# Altium PCB PowerLightBoard.PcbDoc
Units mil, origin at the board's own origin, x right, y up, seen from the top; angles counter-clockwise.
Board outline 2245 x 649.61 mil, 2 copper layers (Top Layer, Bottom Layer); 26 components, 24 nets, 98 pads, 25 vias.
Unrouted connection lines stored in the file: 1.
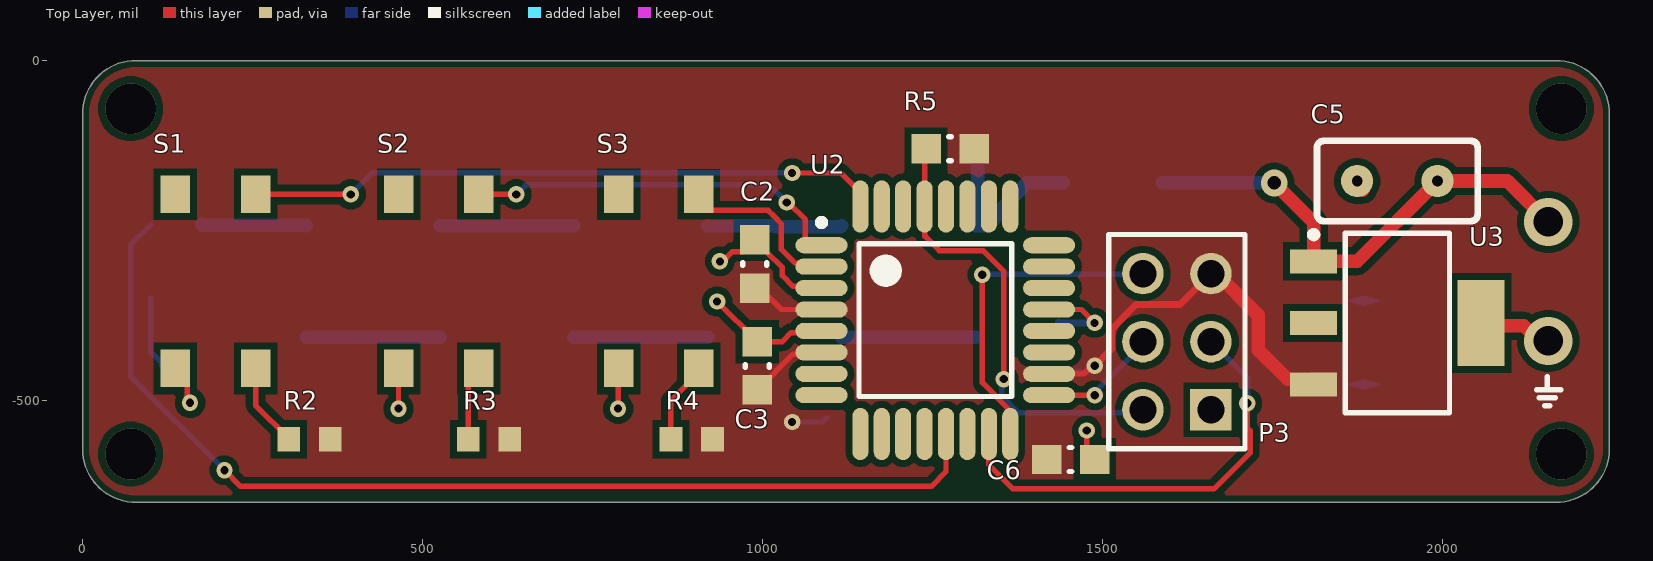
[diagram p0: Top Layer view]
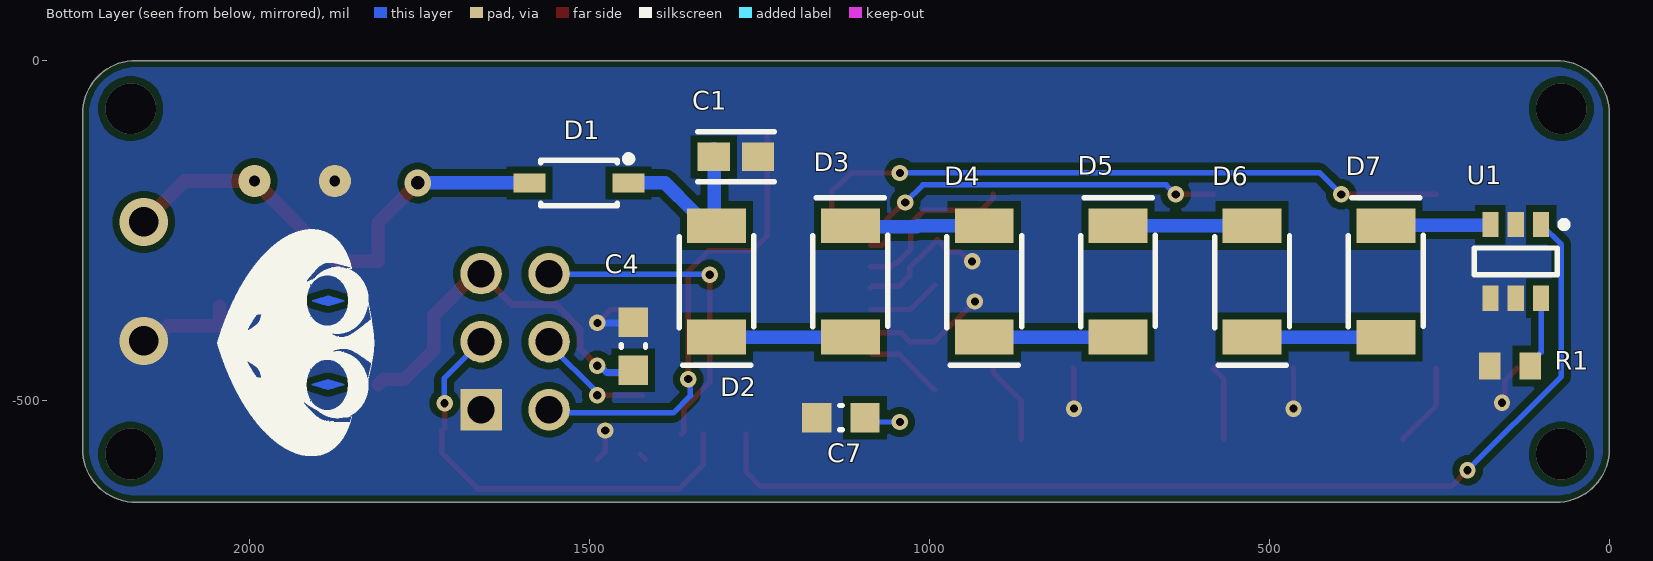
[diagram p1: Bottom Layer view, seen from below]
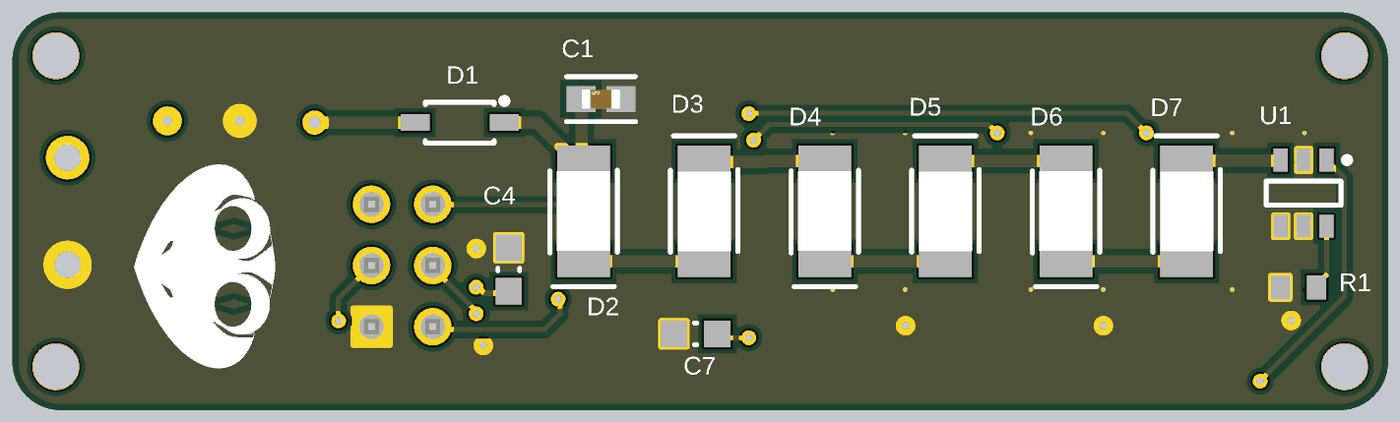
[diagram p2: 3D render of the assembled board from below, using the file's embedded part models]

## Layer stack, top to bottom
Top Solder: solder mask 0.4, Solder Resist, Dk 3.5
Top Layer: signal copper 1.4
Dielectric 1: dielectric 12.6, FR-4, Dk 4.8
Bottom Layer: signal copper 1.4
Bottom Solder: solder mask 0.4, Solder Resist, Dk 3.5

## Board outline
0,-570.87 0,-78.74 cw(c78.74,-78.74) 78.74,0 2166.26,0 cw(c2166.26,-78.74) 2245,-78.74 2245,-570.87 cw(c2166.26,-570.87) 2166.26,-649.61 78.74,-649.61 cw(c78.74,-570.87)

## Design rules (kind name [scope] priority, off if disabled: settings)
BoardOutlineClearance [All] p1: gap=10 ignorepadtopadclearanceinfootprint=FALSE except(0: Arc-SplitContinuation Track-SplitContinuation SMDPad-SplitContinuation THPad-SplitContinuation Via-SplitContinuation Fill-SplitContinuation Poly-SplitContinuation Region-SplitContinuation Text-SplitContinuation)
Clearance [All] p1: gap=10 ignorepadtopadclearanceinfootprint=FALSE except(0: Arc-Hole Track-Hole SMDPad-Hole THPad-Hole Via-Hole Fill-Hole Poly-Hole Region-Hole Text-Hole; 5.91: SMDPad-SMDPad)
HoleSize [All] p1: absolutevalues=TRUE maxlimit=248.03 minlimit=12 maxpercent=80.000 minpercent=20.000
MinimumAnnularRing MinimumAnnularRing_1 [All] p1: minimumring=6
MinimumSolderMaskSliver MinimumSolderMaskSliver_sameNet [Net vs Net] p1: minsoldermaskwidth=5.91
MinimumSolderMaskSliver [All] p2: minsoldermaskwidth=8
PolygonConnect [All] p1: connectstyle=Direct reliefconductorwidth=10 reliefentries=4 polygonreliefangle="90 Angle" airgapwidth=10
RoomDefinition Atmega328p-AU [InComponentClass('Atmega328p-AU')] p1: confinementstyle=ConfineOut formatcopy=TRUE lockcomponents=FALSE outline 2657.48,196.85 6632.48,196.85 6632.48,766.85 2657.48,766.85
RoomDefinition Leds [InComponentClass('Leds')] p2: confinementstyle=ConfineOut formatcopy=TRUE lockcomponents=FALSE outline 2495,-1262.17 3245,-1262.17 3245,-927.17 2495,-927.17
RoutingVias [All] p1: holewidth=28 width=50 viastyle="Through Hole" minholewidth=12 minwidth=0 maxholewidth=196.85 maxwidth=196.85
SilkToSolderMaskClearance [IsPad] p1: minsilkscreentomaskgap=5.91 clearancetoexposedcopper=TRUE
SolderMaskExpansion [All] p1: expansion=4 istentingtop=FALSE
Width [All] p1: maxlimit=50 minlimit=7 preferedwidth=10 minimp=50.000000 maximp=50.000000 favimp=50.000000
27 further rules are at their usual default settings.

## Classes and differential pairs
component class Atmega328p-AU: C2 C3 C4 C5 C6 C7 P1 P3 R2 R3 R4 R5 S1 S2 S3 U2 U3
component class Leds: C1 D1 D2 D3 D4 D5 D6 D7 R1 U1

## Components (designator, comment, footprint, x,y, rotation, side; value= is the part's Value field where it differs from the comment)
C1 "0.1uF" FP-0603-L_1_6_0_15-W_0_81-IPC_A 1284.48,-141.73 r0 bottom
C2 "1uF" CAPC0603(1608)100_M 992.13,-448.82 r270 top value=20pF
C3 "0.1uF" CAPC0603(1608)100_M 988.19,-299.21 r270 top value=20pF
C4 "1uF" CAPC0603(1608)100_M 1435,-420 r90 bottom value=20pF
C5 "0.33uF" "THT_Ceramic_Small_Cap - duplicate" 1874.02,-177.17 r0 top
C6 "0.1uF" CAPC0603(1608)100_M 1452.76,-586.61 r180 top value=20pF
C7 "0.1uF" CAPC0603(1608)100_M 1130,-525 r180 bottom value=20pF
D1 "1N5819HW" DIOD-SOD-123-2_V 1515,-180 r180 bottom
D2 "S1W0-2835508003" S1W0-2835508003 1312.83,-242.87 r270 bottom
D3 "S1W0-2835508003" S1W0-2835508003 1116.22,-406.73 r90 bottom
D4 "S1W0-2835508003" S1W0-2835508003 919.13,-242.87 r270 bottom
D5 "S1W0-2835508003" S1W0-2835508003 722.52,-406.73 r90 bottom
D6 "S1W0-2835508003" S1W0-2835508003 525.43,-242.87 r270 bottom
D7 "S1W0-2835508003" S1W0-2835508003 328.82,-406.73 r90 bottom
P3 "TSW-103-08-F-D" SMTC-TSW-103-08-X-D 1659.06,-513.39 r90 top
R1 "" RESC1608X55X25ML10T15 146.22,-449.02 r180 bottom
R2 "10K" 0603_Resistor 333.82,-556.85 r0 top
R3 "10K" 0603_Resistor 597.56,-556.85 r0 top
R4 "10K" 0603_Resistor 895.67,-556.85 r0 top
R5 "1K" RESC0603(1608)_M 1275.59,-129.92 r0 top value="1000.00 Ohm"
S1 "TS-1109S-C-I" TS-1109S-C-I 229.41,-231.85 r270 top
S2 "TS-1109S-C-I" TS-1109S-C-I 557.83,-231.85 r270 top
S3 "TS-1109S-C-I" TS-1109S-C-I 881.26,-231.85 r270 top
U1 "IS32LT3178" SOT95P280X135-6N 137.8,-295.28 r270 bottom
U2 "ATmega328P-AU" 32A_M 1253.78,-381.85 r0 top locked
U3 "UA78M05" UA78M05 1933.07,-385.83 r0 top

## Footprints (in the part's own frame and the unit in brackets; to place one, negate y for a bottom-side part, rotate by r counter-clockwise, add the part's x,y. Pads: shape width x height; smd on the part's side, far side on the other; paste and mask are expansions set on the pad)
32A_M [mm] "Thin QFP, 32-Leads, Body 7x7mm, Pitch 0.8mm, IPC Low Density"
  oval 1.95x0.6 smd: 1(-4.25,2.8) 2(-4.25,2) 3(-4.25,1.2) 4(-4.25,0.4) 5(-4.25,-0.4) 6(-4.25,-1.2) 7(-4.25,-2) 8(-4.25,-2.8) 17(4.25,-2.8) 18(4.25,-2) 19(4.25,-1.2) 20(4.25,-0.4) 21(4.25,0.4) 22(4.25,1.2) 23(4.25,2) 24(4.25,2.8)
  oval 0.6x1.95 smd: 9(-2.8,-4.25) 10(-2,-4.25) 11(-1.2,-4.25) 12(-0.4,-4.25) 13(0.4,-4.25) 14(1.2,-4.25) 15(2,-4.25) 16(2.8,-4.25) 25(2.8,4.25) 26(2,4.25) 27(1.2,4.25) 28(0.4,4.25) 29(-0.4,4.25) 30(-1.2,4.25) 31(-2,4.25) 32(-2.8,4.25)
  silkscreen extent -4.37,-2.85 2.85,3.77, body extent -3.5,-3.5 3.5,3.5, height 1.2
0603_Resistor [mm] "Chip Resistor, 2-Leads, Body 1.60x0.80mm, IPC Medium Density"
  rect 0.85x0.9 smd: 1(-0.775,0) 2(0.775,0)
  body extent -0.85,-0.45 0.85,0.45, height 0.55
CAPC0603(1608)100_M [mm] "Chip Capacitor, Body 1.6x0.8mm, Height 1.0mm, IPC Low Density"
  rect 1.1x1.1 smd: 1(-0.9,0) 2(0.9,0)
  silkscreen extent -0.05,-0.45 0.05,0.45, body extent -0.87,-0.47 0.88,0.48, height 1
DIOD-SOD-123-2_V [mm] "SOD-123, 2-Leads, Body 2.85x1.7mm (max), Pitch 3.7mm"
  rect 1.2x0.7 smd: 1(-1.85,0) 2(1.85,0)
  silkscreen extent -1.43,-0.85 1.97,1.02, body extent -1.42,-0.85 1.43,0.85, height 1.45
FP-0603-L_1_6_0_15-W_0_81-IPC_A [mil]
  rect 47.5x42.06 smd paste+0 mask+0: 1(-32.51,0) 2(32.51,0)
  silkscreen extent -56,-37 56,37, body extent -31,-16 31,16, height 35
RESC0603(1608)_M [mm] "Chip Resistor, Body 1.6x0.8mm, IPC Low Density"
  rect 1.1x1.1 smd: 1(-0.9,0) 2(0.9,0)
  silkscreen extent -0.05,-0.45 0.05,0.45, body extent -0.85,-0.47 0.85,0.47, height 0.6
RESC1608X55X25ML10T15 [mm] "Chip Resistor, 2-Leads, Body 1.60x0.80mm, IPC Low Density"
  rect 0.8x1 smd: 1(-0.75,0) 2(0.75,0)
  body extent -0.85,-0.45 0.85,0.45, height 0.55
S1W0-2835508003 [mm]
  rect 1.3x2.2 smd: 1(0,-0.003) 2(4.162,-0.003)
  silkscreen extent 0.38,-1.4 5.21,1.4, body extent 0.42,-1.11 3.72,1.09, height 1
SMTC-TSW-103-08-X-D [mm] ".025 SQ Post Terminal Strip Assembly, 2x3 Pins, Vertical, 2.54mm Pitch, Male"
  rect 1.55x1.55 hole 1.02: 1(0,0)
  round 1.55 hole 1.02: 2(0,2.54) 3(2.54,0) 4(2.54,2.54) 5(5.08,0) 6(5.08,2.54)
  silkscreen extent -1.46,-1.27 6.54,3.81, body extent -1.27,-1.27 6.35,3.81, height 8.38
SOT95P280X135-6N [mm] "SOT23, 6-Leads, Body 2.90x2.80mm, Pitch 0.95mm, IPC Medium Density"
  rect 0.95x0.6 smd: 1(-1.375,0.95) 2(-1.375,0) 3(-1.375,-0.95) 4(1.375,-0.95) 5(1.375,0) 6(1.375,0.95)
  silkscreen extent -1.5,-1.55 0.5,1.92, body extent -0.9,-1.55 0.9,1.55, height 1.35
"THT_Ceramic_Small_Cap - duplicate" [mm]
  round 1.2 hole 0.4: 1(0,0) 2(3,0)
  silkscreen extent -1.5,-1.5 4.5,1.5
TS-1109S-C-I [mm]
  rect 1.4x1.1 / inner rect 0x0 / far side rect 0x0 all layers, no hole: 1(-0.889,0.635) 2(5.611,0.635) 3(5.611,-2.365) 4(-0.889,-2.365)
  body extent -1.21,-3.18 5.79,1.32, height 7.5
UA78M05 [mm] "SOT-223 reg Vout 5v"
  rect 1.75x0.9 smd: 1(-3.125,2.3) 2(-3.125,0) 3(-3.125,-2.3)
  rect 1.75x3.2 smd: 2(3.125,0)
  silkscreen extent -3.25,-3.35 1.95,3.42, body extent -1.85,-3.35 1.85,3.35, height 1.8

## Part data
C1: library part CMP-2006-04378-2, Capacitance=1nF, Case Code (Imperial)=0603, Case Code (Metric)=1608, Dielectric=X7R, Dielectric Material=Ceramic, Max Operating Temperature=125°C, Min Operating Temperature=-55°C, Package Quantity=4000, Tolerance=10%, Voltage=50V, Case/Package=0603, Construction=Flat, Contact Plating=Tin, Depth=0.81mm, Height=0.9mm, Lead Free="Lead Free", Length=1.6mm, Mount="Surface Mount", Number of Pins=2, Packaging="Tape and Reel", Radiation Hardening=No, REACH SVHC="No SVHC", RoHS Compliant=Yes, Series=-, Termination=SMD/SMT, Thickness=0.035inch, Voltage Rating=50V, Voltage Rating (DC)=50V, Weight=7.1E-05oz, Width=0.032inch
C2 C3 C4 C6 C7: library part CMP-1035-00774-1, "CAP 20pF 25V ±0.25pF 0603 (1608 Metric) Thickness 1mm SMD", Case-EIA=0603, Case-Metric=1608, Rated Voltage="25 V", Tolerance=Â±0.25pF, Max Thickness="1 mm", Technology=SMT
C5: library part THT_Ceramic_Small_Cap, "Through hole red disc ceramic capacitor"
D1: library part CMP-0303-00003-1, "1.0 A Surface Mount Schottky Barrier Rectifier, 40 V, -65 to 125 degC, 2-Pin SOD-123 Package, RoHS, Tape and Reel", @ Terminal Temperature TT (degC)=90, Forward Voltage Drop VF (V)=0.45, Manufacturer="Diodes Inc", Maximum Average Rectified Current IO (A)=1, Maximum Reverse Current IR (uA)=50, Operating and Storage Temperature Range="-65 to 125 degC", PartNumber=1N5819HW-7-F, Peak Forward Surge Current IFSM (A)=25, Peak Repetitive Reverse Voltage VRRM (V)=40, @ IF (A)=1, @ VR (V)=40, ComponentLink1Description="Manufacturer URL", ComponentLink1URL=http://www.diodes.com/, ComponentLink2Description=Datasheet, ComponentLink2URL=http://www.diodes.com/datasheets/ds30217.pdf, DatasheetVersion="Rev. 15-2", Mounting Technology="Surface Mount", PackageDescription="2-Pin SOD-123, Body 2.7 x 1.55 mm, Pitch 3.7 mm", PackageReference=SOD-123-2, Packing="Tape and Reel", RoHS=TRUE, Total Capacitance CT (pF)=50, VR (RMS) (V)=28
D2 D3 D4 D5 D6 D7: "LED, Cool 5000K 2.72V 65mA 120° 1411 (3528 Metric)"
P3: library part CMP-1024-00337-1, "0.025\" SQ Post Header, Through-hole, Vertical, -55 to 125 degC, 2.54 mm Pitch, 6-Pin, Male, RoHS", Manufacturer=Samtec, Temperature Range="-55 to 125 degC", ComponentLink1Description="Manufacturer URL", ComponentLink1URL=http://www.samtec.com, ComponentLink2Description=Datasheet, ComponentLink2URL=http://www.samtec.com/documents/webfiles/pdf/TSW_TH.PDF, ComponentLink3Description="Package Specification", ComponentLink3URL=http://www.samtec.com/documents/webfiles/cpdf/TSW-XXX-XX-XXX-X-XX-XXX-MKT.pdf, DatasheetVersion=F-214, Mounting Technology=Through-hole, Orientation=Vertical, PackageDescription=".025[0.64] SQ. Post Terminal Strip Assembly", PackageReference=TSW-103-08-X-D, PackageVersion="DM, 8/1988", PartNumber=TSW-103-08-F-D, Pitch="2.54 mm", RoHS=True
R1: library part CMP-2100-03667-1, Case Code (Imperial)=0603, Case Code (Metric)=1608, Manufacturer=Yageo, Max Operating Temperature=155degC, Min Operating Temperature=-55degC, Package Description="2-Pin Surface Mount Device, Body 1.6 x 0.8 mm", Package Quantity=5000, Power Rating=100mW, Resistance=0mOhm, Temperature Coefficient=200ppm/degreesC, Tolerance=5%, Voltage Rating=50V, Case/Package=0603, Composition=ThickFilm, Contact Plating=Tin, Datasheet URL=http://www.yageo.com/NewPortal/yageodocoutput?fileName=/pdf/R-Chip/PYu-RC_Group_51_RoHS_L_5.pdf, Datasheet Version="Rev. 5, 10/2016", Depth=0.8mm, Height=0.45mm, Lead Free=LeadFree, Length=1.6mm, Manufacturer URL=http://www.yageo.com/, Military Standard=Not, Number of Pins=2, Package Reference=0603, Packaging=TapeandReel, Radiation Hardening=No, REACH SVHC=NoSVHC, RoHSCompliant=true, Termination=SMD/SMT, Voltage Rating (DC)=50V, Width=0.8mm
R2 R3 R4: library part 0603_Resistor, "0603 Resistor"
R5: library part CMP-1012-00510-1, "1K 0.1W 1% 0603 (1608 Metric)  SMD", Case-EIA=0603, Case-Metric=1608, Power="0.1 W", Tolerance="1 %", Technology=SMT
S1 S2 S3: "https://www.x-on.com.au/mpn/xkb/ts1109sci"
U1: "10 TO 150MA CONSTANT CURRENT REG"
U2: library part CMP-0095-00269-1, "8-bit AVR Microcontroller, 32KB Flash, 1KB EEPROM, 2KB SRAM, 32-pin TQFP, Industrial Grade (-40°C to 85°C)", Code_JEDEC=MS-026-ABA, DatasheetVersion="revA, Jan-2010", PackageDescription="32-Lead, 7x7x1.0 mm Body, 0.8mm Lead Pitch, Thin Profile Plastic Quad Flat Package (TQFP)", PackageReference=32A, PackageVersion="revB, Oct-2001"

## Via types
v1: diameter 24, hole 12, Top Layer to Bottom Layer, 18 vias
v2: diameter 74.8, hole 74.8, Top Layer to Bottom Layer, 4 vias
v3: diameter 70.87, hole 43.31, Top Layer to Bottom Layer, 2 vias
v4: diameter 39.37, hole 19.68, Top Layer to Bottom Layer, 1 vias

## Nets (pads, with @x,y where several pads share a name; then routed paths per layer and width w, separated by ;. In a path a pad name is that pad's centre, name@x,y a point inside that pad or via, vN(x,y) a via of type N, cw(c..) or ccw(c..) an arc to the next point about the centre after c; other vN are vias at no path point)
+5: C2.2 C3.2 C4.1 C6.2 C7.2 P3.5 R2.2 R3.2 R4.2 R5.2 U2.4 U2.6 U2.18 U3.3 | length 914.1
  Top Layer w8: C2.2 1044.68,-431.7 1083.85,-431.7 U2.6 ; C3.2@992.13,-330.71 1027.52,-366.1 U2.4 ; C6.2 C6.2@1425.2,-578.74 ; U2.18 1472.09,-460.59 1483.86,-448.82 v1(1488.19,-448.82)
  Top Layer w10: v1(1488.19,-448.82) 1513.54,-423.46 1513.54,-394.53 1549.18,-358.9 1613.54,-358.9 P3.5
  Top Layer w20: P3.5 1667.72,-313.39 1728.35,-374.02 1728.35,-425.2 1771.81,-468.66 1802.32,-468.66 U3.3
  Bottom Layer w8: v1(1043.31,-531.5) 1088.07,-531.5 C7.2
  Bottom Layer w10: C4.1 1438.13,-458.56 1474.66,-458.56 1484.4,-448.82 v1(1488.19,-448.82)
+19: C5.2 D1.1 U3.1 | length 726.3
  Top Layer w20: v4(1751.97,-180) 1810.04,-238.07 U3.1 1874.02,-295.28 C5.2@1989.74,-179.55 ; C5.2@1986.91,-176.72 C5.2@1989.74,-179.55 ; v3(2155,-237.3) 2094.86,-177.17 C5.2 C5.2@1989.74,-179.55
  Bottom Layer w20: D1.1 v4(1751.97,-180)
ENTER: S2.1 U2.1 | length 563.9
  Top Layer w8: S2.1 v1(637.8,-196.85) ; v1(1035.43,-208.66) 1037.21,-208.66 1062.65,-234.1 1062.65,-264.4 1069.86,-271.61 U2.1
  Bottom Layer w8: v1(637.8,-196.85) 651.8,-182.85 882.6,-182.85 1009.62,-182.85 v1(1035.43,-208.66)
GND: C1.1 C2.1 C3.1 C4.2 C5.1 C6.1 C7.1 P3.1 R1.1 S1.3 S2.3 S3.3 U1.2 U1.4 U1.5 U2.3 U2.5 U2.21 U3.2 | length 889.8
  Top Layer w8: S1.3 153.95,-470.41 153.95,-494.74 158.15,-498.94 v1(158.15,-503.27) ; v1(464.57,-511.81) 464.57,-452.91 S2.3 ; v1(787.4,-511.81) 787.4,-453.5 S3.3 ; v1(933.07,-354.33) C2.1 1028.78,-413.39 1041.96,-400.2 1083.85,-400.2 U2.5 ; v1(937.01,-295.28) 941.34,-295.28 955.18,-281.43 970.54,-281.43 C3.1 ; C3.1@988.3,-263.89 1005.84,-281.43 1005.96,-281.43 1028.78,-304.26 1028.78,-316.18 1044.6,-332 1083.85,-332 U2.3 ; U2.21 1468.46,-366.1 1488.01,-385.64 v1(1488.01,-385.76) ; v1(1476.38,-544.09) 1476.38,-574.8 C6.1
  Top Layer w20: C5.1@1880.39,-188.31 C5.1@1882.48,-190.39 ; U3.2@2043.03,-361.46 2043.03,-390 2118.93,-390 2141.24,-412.3 v3(2155,-412.3)
  Bottom Layer w10: C4.2 1436.2,-385.76 v1(1488.01,-385.76)
LEFT: S1.1 U2.32 | length 936.1
  Top Layer w8: S1.1 v1(394.3,-196.85) ; v1(1043.31,-165.35) 1115.08,-165.35 1134.69,-184.96 1136.33,-184.96 1143.54,-192.18 U2.32
  Bottom Layer w8: v1(394.3,-196.85) 426.3,-164.85 1042.8,-164.85 v1(1043.31,-165.35)
MISO: P3.6 U2.16 | length 488.1
  Top Layer w8: v1(1322.83,-314.96) 1322.83,-473.7 1361.03,-511.89 1361.03,-546.18 U2.16
  Bottom Layer w8: v1(1322.83,-314.96) 1323.62,-314.17 1558.27,-314.17 P3.6
MOSI: P3.3 U2.15 | length 654
  Top Layer w8: U2.15 1332.52,-594.64 1367.8,-629.92 1663.39,-629.92 1716.54,-576.77 1716.54,-544.49 1712.6,-540.55 v1(1712.6,-503.94)
  Bottom Layer w8: P3.3 1713.47,-467.8 1713.47,-503.06 v1(1712.6,-503.94)
NetC1_2: C1.2 D1.2 D2.1 | length 272.4
  Bottom Layer w20: C1.2@1315.98,-129.92 1315.98,-239.85 D2.1 1330.67,-242.87 1346.26,-227.28 1346.26,-222.28 1388.54,-180 D1.2
NetD2_2: D2.2 D3.1 | length 196.9
  Bottom Layer w20: D3.1 D2.2
NetD3_2: D3.2 D4.1 | length 198.3
  Bottom Layer w20: D4.1 1016.82,-242.87 1018.54,-244.6 1114.38,-244.6 D3.2
NetD4_2: D4.2 D5.1 | length 196.9
  Bottom Layer w20: D5.1 D4.2
NetD5_2: D5.2 D6.1 | length 196.9
  Bottom Layer w20: D6.1 D5.2
NetD6_2: D6.2 D7.1 | length 196.9
  Bottom Layer w20: D7.1 D6.2
NetR1_2: R1.2 U1.6 | length 106.4
  Bottom Layer w8: U1.6 100.39,-428.78 116.69,-445.08 R1.2
NetR2_1: R2.1 S1.2 | length 124.3
  Top Layer w8: S1.2 254.41,-506.97 303.31,-555.87 R2.1
NetR3_1: R3.1 S2.2 | length 110.6
  Top Layer w8: R3.1 567.05,-468.54 S2.2
NetR4_1: R4.1 S3.2 | length 121.1
  Top Layer w8: R4.1 865.16,-499.76 906.26,-458.66 S3.2
OUT: D7.2 U1.3 | length 154.2
  Bottom Layer w20: U1.3 176.06,-242.01 327.83,-242.01 D7.2
PWM: U1.1 U2.13 | length 1565.4
  Top Layer w8: v1(208.66,-602.36) 232.28,-625.98 1248.03,-625.98 1269.53,-604.49 U2.13
  Bottom Layer w8: U1.1 70.87,-270.67 70.87,-464.57 v1(208.66,-602.36)
RESET: P3.2 R5.1 U2.29 | length 688.3
  Top Layer w8: R5.1@1238.03,-112.17 U2.29 1238.56,-215.06 1238.56,-258.25 1259.84,-279.53 1324.17,-279.53 1354.37,-309.73 v1(1354.37,-468.46)
  Bottom Layer w8: v1(1354.37,-468.46) 1351.31,-471.52 1351.31,-492.46 1351.02,-492.75 1376.35,-518.09 1554.35,-518.09 P3.2
RIGHT: S3.1 U2.2 | length 249.7
  Top Layer w8: S3.1 906.26,-202.76 923.91,-220.41 1007.93,-220.41 1015.64,-228.13 1027.56,-240.04 1027.56,-277.58 1047.65,-297.67 1050.21,-297.67 1055.65,-303.11 U2.2
RX: U2.30
SCK: P3.4 U2.17 | length 188.3
  Top Layer w8: U2.17 v1(1488.19,-492.09) ; P3.4@1559.06,-426.53 P3.4
  Bottom Layer w8: v1(1488.19,-492.09) 1488.19,-488.17 1559.06,-417.3 P3.4
TX: U2.31
pads on no net: S1.4 S2.4 S3.4 U2.7 U2.8 U2.9 U2.10 U2.11 U2.12 U2.14 U2.19 U2.20 U2.22 U2.23 U2.24 U2.25 U2.26 U2.27 U2.28
copper on no net:
  other v2: 70.87,-578.74 2174.13,-578.74 70.87,-70.87 2174.13,-70.87

## Polygon pours and split planes (outlines as drawn)
GND on Bottom Layer "GND_L02_P002" (solid, remove dead copper, pour order 2): -0.28,10 2349.72,10 2354.72,5 2354.72,-745 -5,-745
+5 on Top Layer "+5_L01_P000" (solid, remove dead copper, pour order 0): -45,75 2305,75 2310,70 2310,-680 -49.72,-680

## Other copper
Bottom Layer:
  region: 253 vertices and 0 holes, not listed, extent 1860.33,-483.87 1907.81,-468.9
  region: 255 vertices and 0 holes, not listed, extent 1860.09,-360.83 1907.58,-345.86

## Silkscreen, mask and mechanical layers (free items; w line width, h text height)
Top Overlay:
  lines w8: 2137.8,-484.25 2173.23,-484.25 2153.54,-484.25 2153.54,-464.57 ; 2141.73,-496.06 2165.35,-496.06 ; 2149.61,-507.87 2157.48,-507.87
Bottom Overlay:
  region: 3049 vertices and 22 holes, not listed, extent 1816.35,-581.4 2046.99,-248.32
Mechanical 1:
  the board outline again, w10